# Altium PCB RT5572.PcbDoc
Units mil, origin at the board's own origin, x right, y up, seen from the top; angles counter-clockwise.
Board outline 1354.61 x 1795 mil, 4 copper layers (Top Layer, GND, Signal Layer 1, Bottom Layer), stack 39.217 mil thick; 100 components, 53 nets, 300 pads, 138 vias.
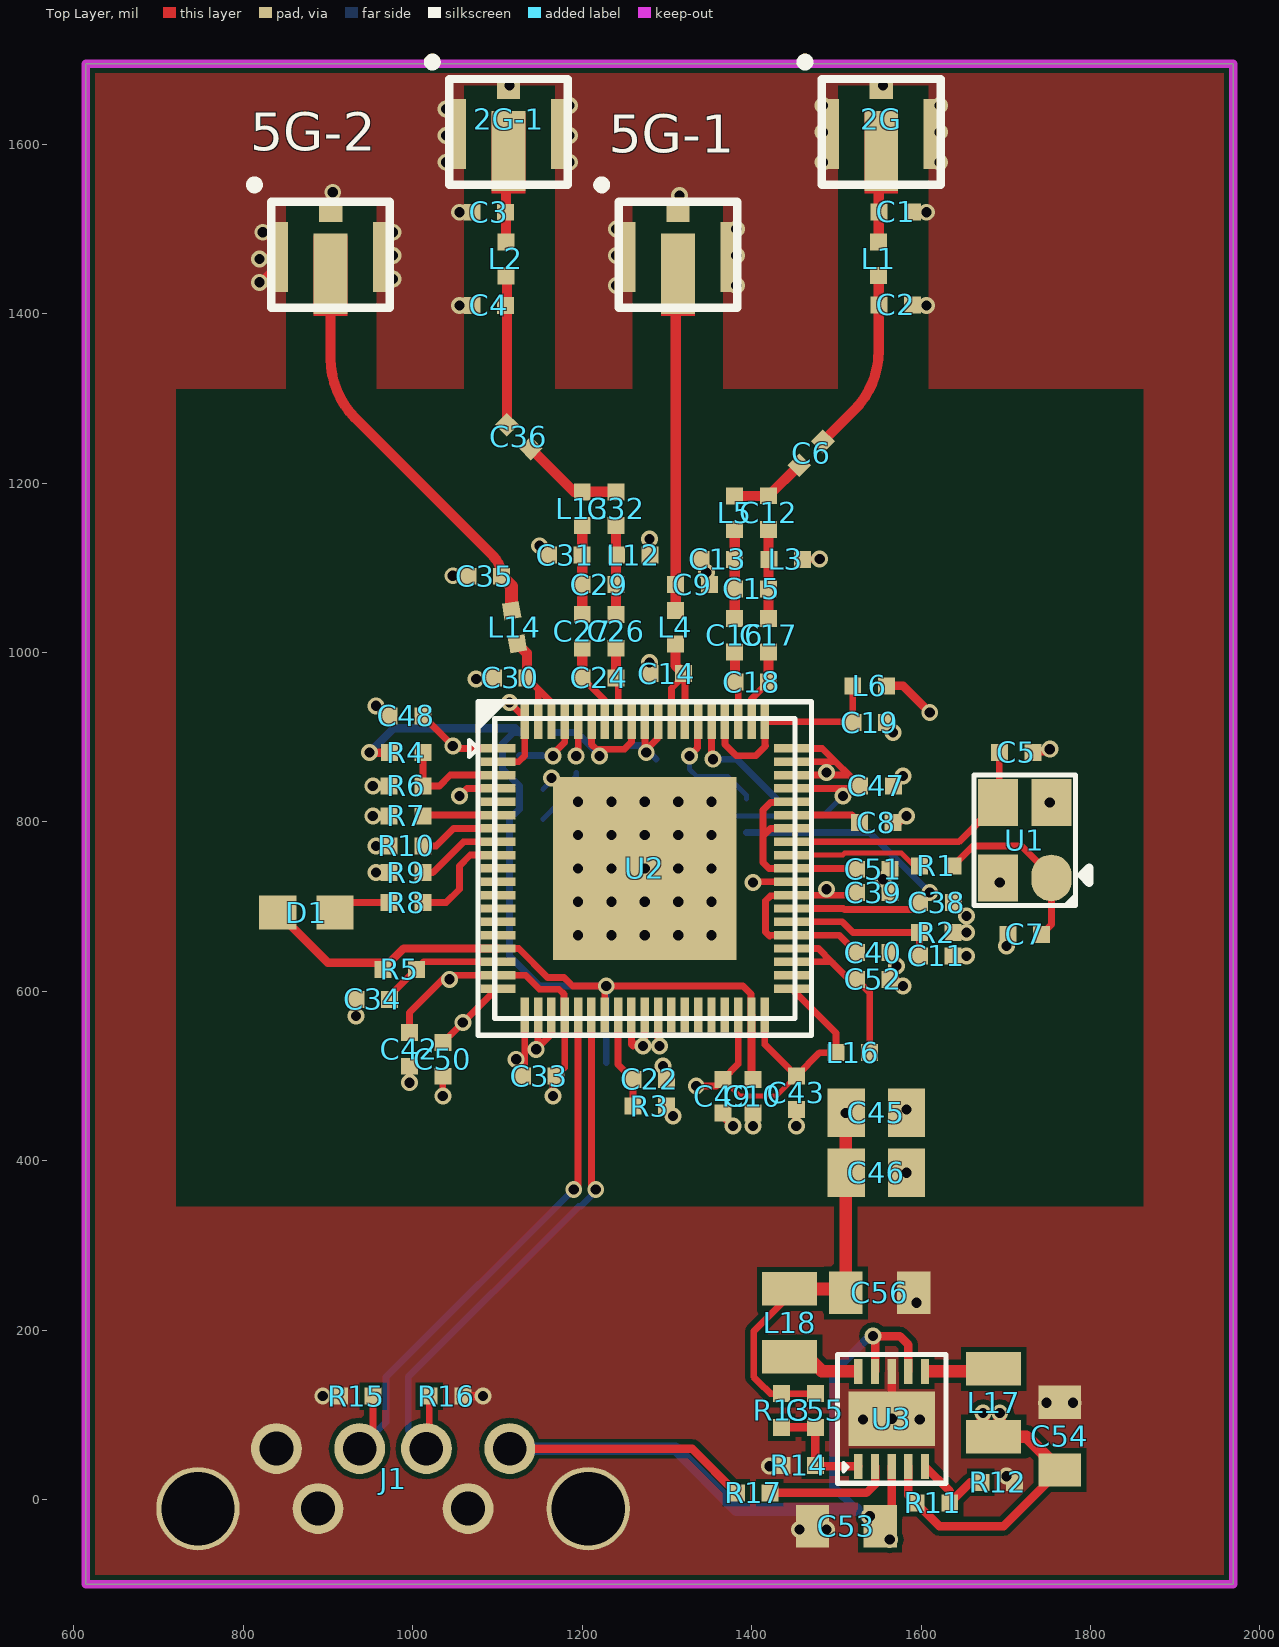
[diagram p0: Top Layer view]
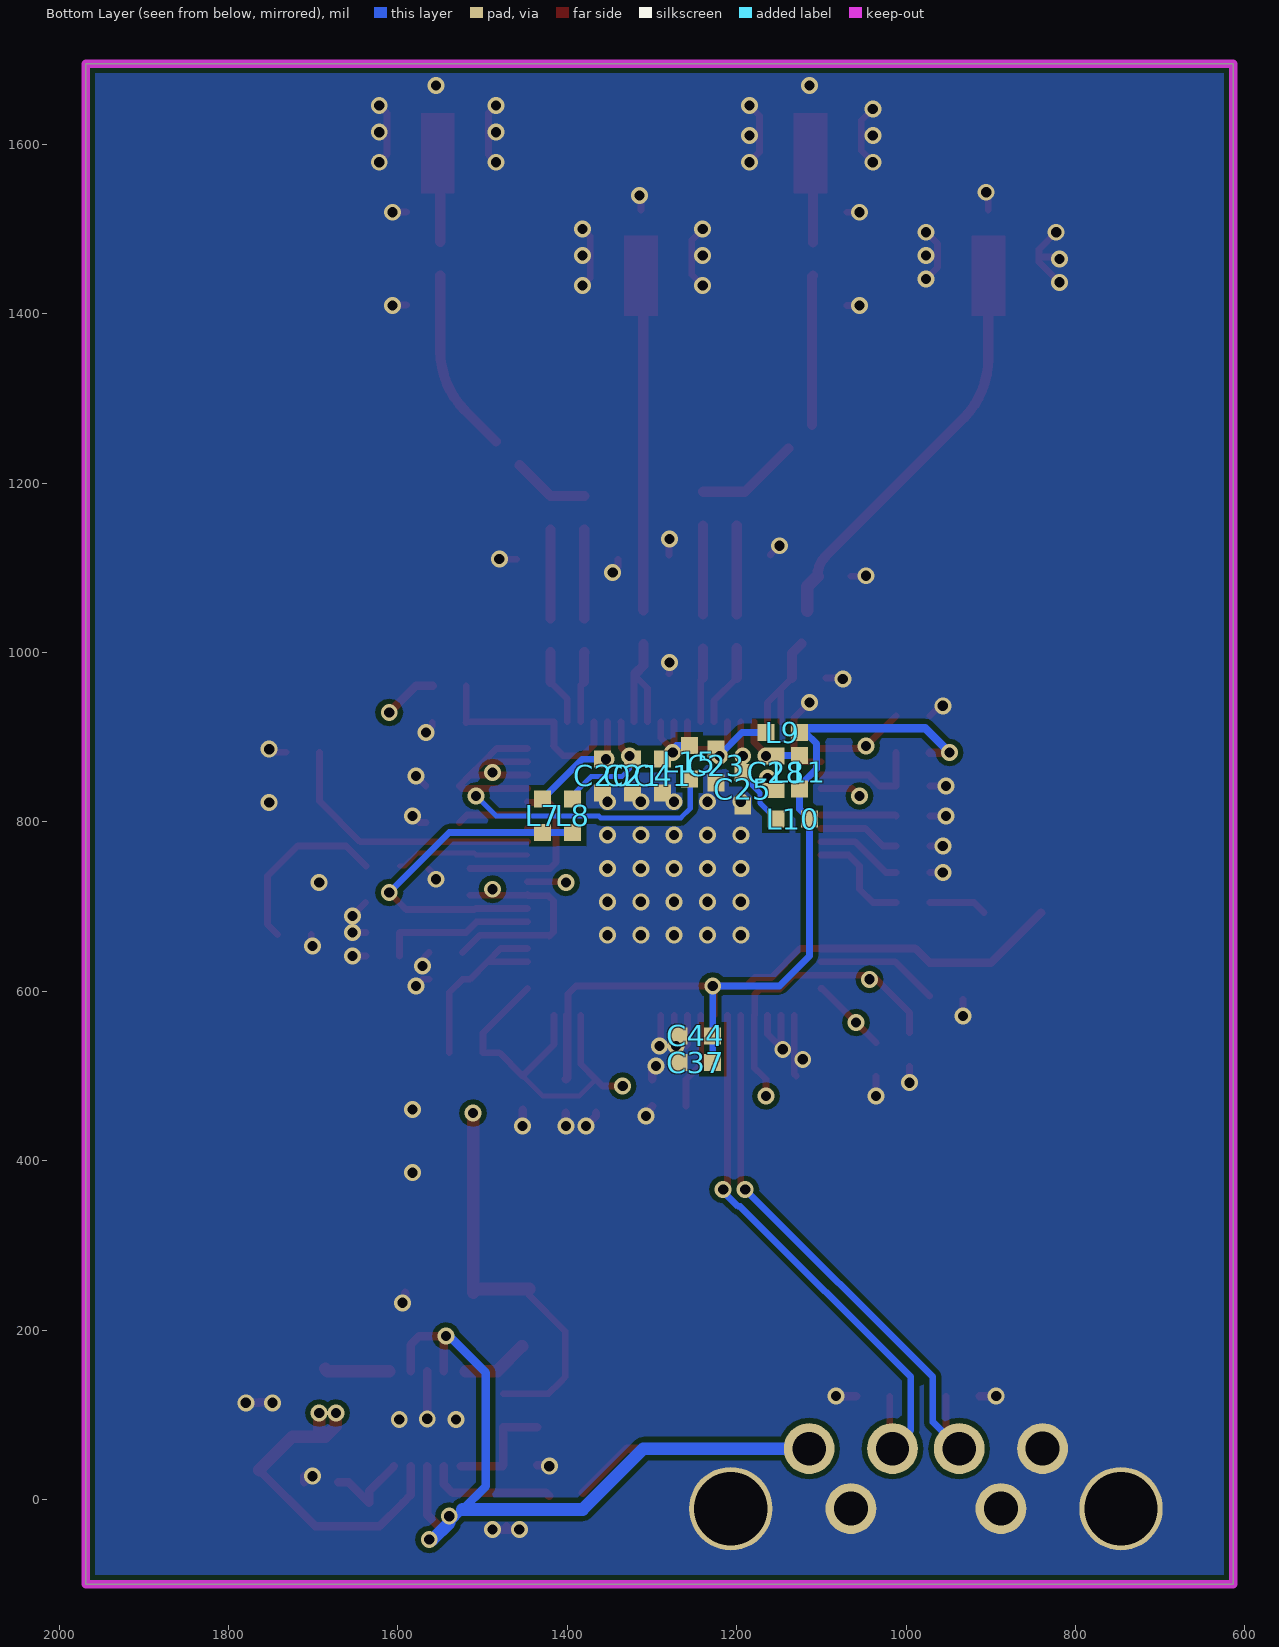
[diagram p1: Bottom Layer view, seen from below]
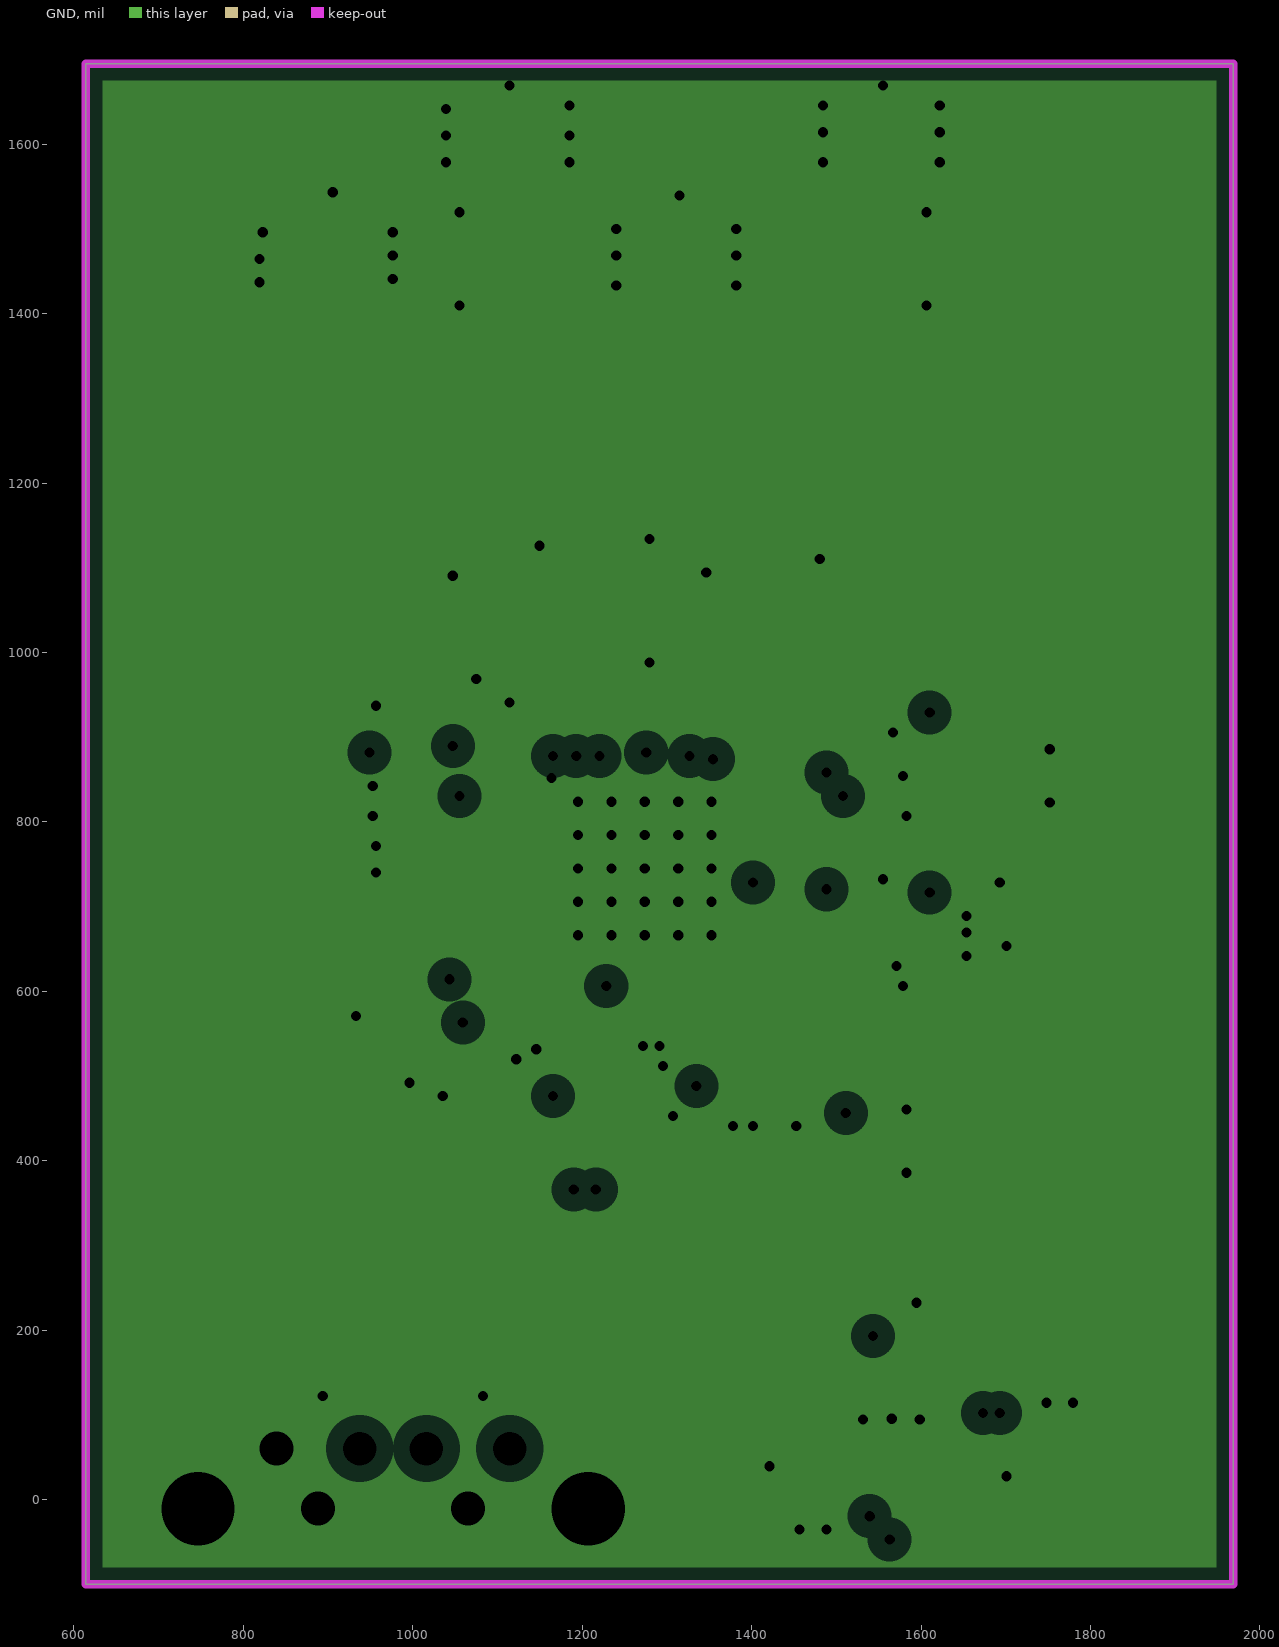
[diagram p2: GND, clearances drawn from the general rule]
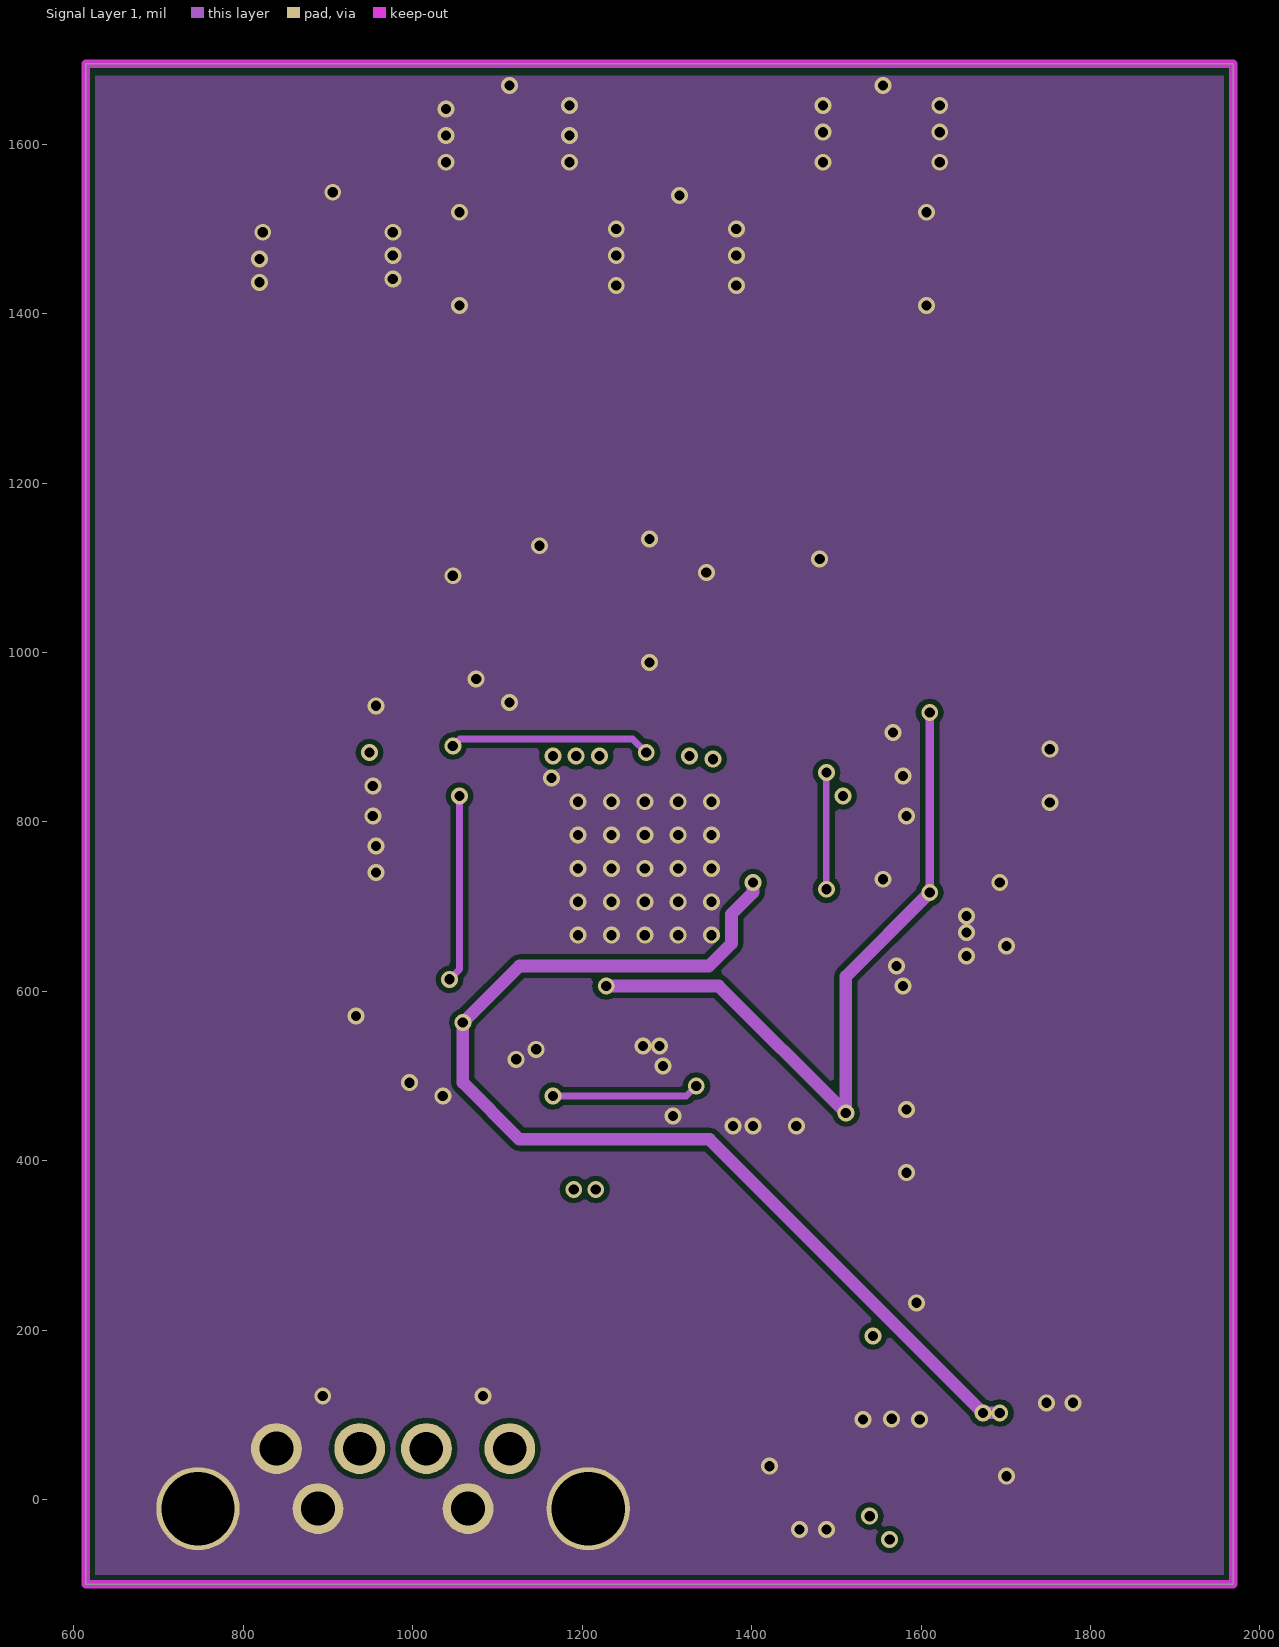
[diagram p3: Signal Layer 1]

## Layer stack, top to bottom
Top Solder: solder mask 0.4, Solder Resist, Dk 3.5
Top Layer: signal copper 1.4
Dielectric1: core 7.6772, FR-4, Dk 4.2
GND: plane copper 0.689, net GND
Dielectric 3: prepreg 19.685, Dk 4.2
Signal Layer 1: signal copper 0.689
Dielectric 2: core 7.6772, Dk 4.2
Bottom Layer: signal copper 1.4
Bottom Solder: solder mask 0.4, Solder Resist, Dk 3.5

## Board outline
613.9,-100 613.9,1695 1968.5,1695 1968.5,-100

## Design rules (kind name [scope] priority, off if disabled: settings)
Clearance [All] p1: gap=6
MinimumSolderMaskSliver [All] p1 off: minsoldermaskwidth=10
PlaneClearance [All] p1: clearance=20
PlaneConnect [All] p1: planeconnectstyle=Direct reliefexpansion=20 reliefentries=4 reliefconductorwidth=10 reliefairgap=10
PolygonConnect [All] p1: connectstyle=Direct reliefconductorwidth=10 reliefentries=4 polygonreliefangle="90 Angle" airgapwidth=10
RoomDefinition 4-USB-A [InComponentClass('4-USB-A')] p1 off: confinementstyle=ConfineIn formatcopy=TRUE lockcomponents=FALSE outline -5946.1,-8780 -3946.1,-8780 -3946.1,-7780 -5946.1,-7780
RoomDefinition 3-RT5572-WLAN [InComponentClass('3-RT5572-WLAN')] p2 off: confinementstyle=ConfineIn formatcopy=TRUE lockcomponents=FALSE outline -5946.1,-8780 -3946.1,-8780 -3946.1,-7780 -5946.1,-7780
RoomDefinition 2-FrontEnd [InComponentClass('2-FrontEnd')] p3 off: confinementstyle=ConfineIn formatcopy=TRUE lockcomponents=FALSE outline -5946.1,-8780 -3946.1,-8780 -3946.1,-7780 -5946.1,-7780
RoutingVias [All] p1: holewidth=12 width=20 viastyle="Through Hole" minholewidth=12 minwidth=20 maxholewidth=28 maxwidth=50
SilkToSilkClearance [All] p1 off: silktosilkclearance=10
SilkToSolderMaskClearance [IsPad] p1 off: minsilkscreentomaskgap=10 clearancetoexposedcopper=TRUE
SolderMaskExpansion [All] p1 off: expansion=4
UnpouredPolygon [All] p1: allowunpoured=FALSE
Width [All] p1: maxlimit=20 minlimit=6 preferedwidth=10
24 further rules are at their usual default settings.

## Classes and differential pairs
component class 2-FrontEnd: 2G 2G-1 5G 5G-1 5G-2 C1 C2 C3 C4 C9 C14 C30 C35 L1 L2 L4 L14
component class 3-RT5572-WLAN: C5 C6 C7 C8 C10 C11 C12 C13 C15 C16 C17 C18 C19 C20 C21 C22 C23 C24 C25 C26 C27 C28 C29 C31 C32 C33 C34 C36 C37 C38 C39 C40 C41 C42 C43 C44 C45 C46 C47 C48 C49 C50 C51 C52 D1 L3 L5 L6 L7 L8 L9 L10 L11 L12 L13 L15 L16 R1 R2 R3 R4 R5 R6 R7 R8 R9 R10 U1 U2
component class 4-USB-A: C53 C54 C55 C56 J1 L17 L18 R11 R12 R13 R14 R15 R16 R17 U3

## Components (designator, comment, footprint, x,y, rotation, side; value= is the part's Value field where it differs from the comment)
2G "IPEX" IPEX 1555,1610 r0 top
2G-1 "IPEX" IPEX 1115,1610 r0 top
5G-1 "IPEX" IPEX 1315,1465 r0 top
5G-2 "IPEX" IPEX 905,1465 r0 top
C1 "0.3pF" 0402 1570,1520 r0 top
C2 "0.3pF" 0402 1570,1410.32 r0 top
C3 "0.3pF" 0402 1090,1519.69 r180 top
C4 "0.3pF" 0402 1090,1409.69 r180 top
C5 "8.2pF" 0402 1712.4,882.13 r180 top
C6 "2.7pF" 0402 1470,1235 r45 top
C7 "47pF" 0402 1722.4,667.13 r180 top
C8 "22nF" 0402 1547.24,799.21 r180 top
C9 "NI" 0402 1330,1080 r0 top
C10 "0.1uF" 0402 1401.57,476.38 r270 top
C11 "100pF" 0402 1618.11,641.73 r180 top
C12 "1.2pF" 0402 1420,1165 r90 top
C13 "1.2pF" 0402 1360,1110 r0 top
C14 "0.4pF" 0402 1300,975 r180 top
C15 "NI" 0402 1400,1075 r180 top
C16 "1.2pF" 0402 1380,1020 r90 top
C17 "1.2pF" 0402 1420,1020 r90 top
C18 "1pF" 0402 1400,965 r0 top
C19 "5.6pF" 0402 1539.37,917.32 r0 top
C20 "1uF" 0402 1358.27,854.33 r270 bottom
C21 "1uF" 0402 1322.83,854.33 r270 bottom
C22 "1pF" 0402 1279.53,496.06 r0 top
C23 "0.1uF" 0402 1224.41,866.14 r270 bottom
C24 "1pF" 0402 1220,970 r180 top
C25 "1uF" 0402 1192.91,838.58 r270 bottom
C26 "2pF" 0402 1240,1025 r270 top
C27 "2pF" 0402 1200,1025 r270 top
C28 "1uF" 0402 1153.54,858.27 r270 bottom
C29 "1.2pF/NI" 0402 1220,1080 r180 top
C30 "0.4pF" 0402 1115,970 r180 top
C31 "1pF" 0402 1180,1115 r180 top
C32 "1pF" 0402 1240,1170 r270 top
C33 "1uF" 0402 1149.61,500 r180 top
C34 "0.1uF" 0402 952.76,590.55 r180 top
C35 "NI" 0402 1085,1090 r180 top
C36 "10pF" 0402 1125,1255 r315 top
C37 "0.1uF" 0402 1248.03,515.75 r0 bottom
C38 "0.1uF" 0402 1618.11,704.72 r0 top
C39 "0.1uF" 0402 1543.31,716.54 r0 top
C40 "NI" 0402 1543.31,645.67 r0 top
C41 "1uF" 0402 1287.4,854.33 r270 bottom
C42 "0.1uF" 0402 996.06,531.5 r270 top
C43 "1uF/NI" 0402 1452.76,480.32 r270 top
C44 "1uF" 0402 1248.03,547.24 r0 bottom
C45 "10uF" 0805#1 1547.24,456.69 r0 top
C46 "10uF" 0805#1 1547.24,385.83 r0 top
C47 "1uF" 0402 1547.24,842.52 r0 top
C48 "1uF" 0402 992.13,925.2 r180 top
C49 "0.1uF" 0402 1366.14,476.38 r270 top
C50 "1uF" 0402 1035.43,519.68 r270 top
C51 "1uF" 0402 1543.31,744.09 r0 top
C52 "0.1uF" 0402 1543.31,614.17 r0 top
C53 "10UF" 0805#2 1511.81,-31.5 r0 top
C54 "22UF" 0805#2 1763.78,74.8 r270 top
C55 "33pF" 0402 1475.36,104.98 r90 top
C56 "22UF" 0805#2 1551.18,244.09 r180 top
D1 "LED" 0603 874.02,692.91 r0 top
J1 "USB" USB-A-MALE 976.38,-15.75 r270 top
L1 "1nH" 0402 1550,1465 r270 top
L2 "1nH" 0402 1110,1464.69 r270 top
L3 "3.0nH" 0402 1440,1110 r0 top
L4 "0 ohm" 0402 1310,1030 r270 top
L5 "3.0nH" 0402 1380,1165 r270 top
L6 "0 ohm" 0402 1539.37,960.63 r180 top
L7 "0 ohm" 0402 1429.13,807.09 r90 bottom
L8 "0 ohm" 0402 1393.7,807.09 r90 bottom
L9 "0 ohm" 0402 1145.67,905.51 r0 bottom
L10 "0 ohm" 0402 1133.86,803.15 r0 bottom
L11 "0 ohm" 0402 1125.98,858.27 r90 bottom
L12 "2.7nH" 0402 1260,1115 r0 top
L13 "2.7nH" 0402 1200,1170 r270 top
L14 "0 ohm" 0402 1120,1030 r280 top
L15 "0 ohm" 0402 1255.91,870.08 r90 bottom
L16 "0 ohm" 0402 1519.69,527.56 r180 top
L17 "2.2UH" 0806 1685.79,114.29 r270 top
L18 "3.3UH" 0806 1444.88,208.66 r90 top
R1 "0 ohm" 0402 1618.11,748.03 r180 top
R2 "12K" 0402 1618.11,669.29 r180 top
R3 "8.2K" 0402 1279.53,464.57 r0 top
R4 "1K" 0402 992.13,881.89 r0 top
R5 "100K" 0402 984.25,625.98 r0 top
R6 "1K/NI" 0402 992.13,842.52 r180 top
R7 "4.7K" 0402 992.13,807.09 r180 top
R8 "330R" 0402 992.13,704.72 r180 top
R9 "4.7K" 0402 992.13,740.16 r180 top
R10 "4.7K" 0402 992.13,771.65 r180 top
R11 "270k" 0402 1614.17,-3.94 r180 top
R12 "180k" 0402 1690.36,20.29 r0 top
R13 "300k" 0402 1435.36,104.98 r90 top
R14 "68k" 0402 1455.67,40.29 r180 top
R15 "1M/NI" 0402 933.07,122.05 r0 top
R16 "1M/NI" 0402 1039.37,122.05 r180 top
R17 "10k" 0402 1401.57,7.87 r0 top
U1 "XTAL/3.2x2.5/40MHz/85C" XTAL-SMD/3.2X2.5 1722.4,777.13 r270 top
U2 "RT5572-QFN76" QFN40P-900X900X90-77N 1273.9,745 r0 top
U3 "Tps62410" DFN-10P-3X3 1565.32,96.29 r90 top

## Footprints (in the part's own frame and the unit in brackets; to place one, negate y for a bottom-side part, rotate by r counter-clockwise, add the part's x,y. Pads: shape width x height; smd on the part's side, far side on the other; paste and mask are expansions set on the pad)
0402 [mil] "0402-RES"
  rect 20x20 smd: 1(-19.68,0) 2(20,0)
0603 [mil] "0603-RES"
  rect 44x40 smd: 1(-33.46,0) 2(34,0)
0805#1 [mil]
  rect 44x57 smd: 1(-35.5,0) 2(35.5,0)
0805#2 [mil]
  rect 39.37x50 smd: 1(-40,0) 2(40,0)
  body extent -50,-30 50,30, height 31
0806 [mm]
  rect 1x1.65 smd: 1(-1.016,0) 2(1.016,0)
  body extent -1,-0.8 1,0.8, height 0.5
DFN-10P-3X3 [mm]
  rect 0.75x0.25 smd mask+0.064: 1(-1.451,0.999) 2(-1.451,0.499) 3(-1.451,-0.001) 4(-1.451,-0.501) 5(-1.451,-1.001) 6(1.4,-1.001) 7(1.4,-0.501) 8(1.4,-0.001) 9(1.4,0.499) 10(1.4,0.999)
  rect 1.64x2.6 smd: 11(-0.025,-0.001)
  silkscreen extent -1.96,-1.63 1.9,1.62
IPEX [mil]
  rect 40x95 smd: 1(-2,-18)
  rect 19.68x82.68 smd: 2(-62,2) 2(58,2)
  rect 27.56x27.56 smd: 2(-2,57)
  Top Layer region: -22,-68 18,-68 18,27 -22,27
  silkscreen extent -97,-58 68,92
QFN40P-900X900X90-77N [mm]
  rect 1.05x0.254 smd mask+0: 1(-4.4,3.6) 2(-4.4,3.2) 3(-4.4,2.8) 4(-4.4,2.4) 5(-4.4,2) 6(-4.4,1.6) 7(-4.4,1.2) 8(-4.4,0.8) 9(-4.4,0.4) 10(-4.4,0) 11(-4.4,-0.4) 12(-4.4,-0.8) 13(-4.4,-1.2) 14(-4.4,-1.6) 15(-4.4,-2) 16(-4.4,-2.4) 17(-4.4,-2.8) 18(-4.4,-3.2) 19(-4.4,-3.6)
  rect 0.254x1.05 smd: 20(-3.601,-4.4) 21(-3.201,-4.4) 22(-2.801,-4.4) 23(-2.401,-4.4) 24(-2.001,-4.4) 25(-1.601,-4.4) 26(-1.201,-4.4) 27(-0.801,-4.4) 28(-0.401,-4.4) 29(-0.001,-4.4) 30(0.399,-4.4) 31(0.799,-4.4) 32(1.199,-4.4) 33(1.599,-4.4) 34(1.999,-4.4) 35(2.399,-4.4) 36(2.799,-4.4) 37(3.199,-4.4) 38(3.599,-4.4) 58(3.602,4.4) 59(3.202,4.4) 60(2.802,4.4) 61(2.402,4.4) 62(2.002,4.4) 63(1.602,4.4) 64(1.202,4.4) 65(0.802,4.4) 66(0.402,4.4) 67(0.002,4.4) 68(-0.398,4.4) 69(-0.798,4.4) 70(-1.198,4.4) 71(-1.598,4.4) 72(-1.998,4.4) 73(-2.398,4.4) 74(-2.798,4.4) 75(-3.198,4.4) 76(-3.598,4.4)
  rect 1.05x0.254 smd: 39(4.4,-3.6) 40(4.4,-3.2) 41(4.4,-2.8) 42(4.4,-2.4) 43(4.4,-2) 44(4.4,-1.6) 45(4.4,-1.2) 46(4.4,-0.8) 47(4.4,-0.4) 48(4.4,0) 49(4.4,0.4) 50(4.4,0.8) 51(4.4,1.2) 52(4.4,1.6) 53(4.4,2) 54(4.4,2.4) 55(4.4,2.8) 56(4.4,3.2) 57(4.4,3.6)
  rect 5.5x5.5 smd: 77(0,0)
  silkscreen extent -5.26,-5 5,5
USB-A-MALE [mil]
  round 98.43 hole 86.61: 0(-5,230.63) 0(-5,-230)
  round 60 hole 40: 0(-5,88.9) 0(-5,-88.27) 4(-75.87,-137.48)
  round 60 hole 39.37: 1(-75.87,138.11) 2(-75.87,39.69) 3(-75.87,-39.06)
  body extent 3,-234 743,239, height 157
XTAL-SMD/3.2X2.5 [mm]
  oval 1.4x1.2 smd mask+0.051: 1(1.1,0.8)
  rect 1.4x1.2 smd mask+0.051: 2(-1.163,0.8) 3(-1.162,-0.8) 4(1.1,-0.8)
  silkscreen extent -1.98,-1.52 1.93,1.93

## Part data
2G 2G-1 5G-1 5G-2: library part ANT-RA-USB-1
C1 C2 C3 C4 C5 C6 C7 C8 C9 C10 C11 C12 C13 C14 C15 C16 C17 C18 C19 C20 C21 C22 C23 C24 C25 C26 C27 C28 C29 C30 C31 C32 C33 C34 C35 C36 C37 C38 C39 C40 C41 C42 C43 C44 C47 C48 C49 C50 C51 C52 C53 C54 C55 C56: library part CAP/0402
C45 C46: library part CAP/0603
D1: library part LED/0603
L1 L2 L3 L4 L5 L6 L7 L8 L9 L10 L11 L13 L14 L15 L16: library part L/0402
L12: library part L/0402_0
L17 L18: library part L/2.5*2.0
R1 R2 R5: library part RES/0402_1_Dup1
R3 R15 R16: library part RES/0402_2
R4 R6 R7 R9 R10: library part RES/0402_1_Dup2
R8: library part RES/0402_1
R11 R12 R13 R14 R17: library part RES/0402_3
U1: library part XTAL_2.5
U2: library part RT5572_5

## Via types
v1: diameter 20, hole 12, Top Layer to Bottom Layer, 110 vias
v2: diameter 20/20/20 (per signal layer), hole 12, Top Layer to Bottom Layer, 28 vias

## Nets (pads, with @x,y where several pads share a name; then routed paths per layer and width w, separated by ;. In a path a pad name is that pad's centre, name@x,y a point inside that pad or via, vN(x,y) a via of type N, cw(c..) or ccw(c..) an arc to the next point about the centre after c; other vN are vias at no path point)
1.2VA: C52.1 L16.1 U2.41 U2.42 | length 234.3
  Top Layer w8: U2.41 1494.53,634.76 ; U2.42 1478.78,650.51 1494.53,634.76 ; 1496.06,633.23 1494.53,634.76 ; L16.1 1539.37,598.43 C52.1 1515.12,614.17 1494.53,634.76
1.2VD: C33.1 C42.1 C43.1 C49.1 L16.2 U2.4 U2.18 U2.23 U2.36 U2.38 U2.39 | length 1270.4
  Top Layer w6: C49.1 1385.83,476.38 1429.13,476.38 C43.1
  Top Layer w8: C42.1 996.06,574.8 1040.27,619.01 U2.18 1132.96,619.01 1149.53,602.44 1172.77,602.44 1178.63,596.58 1178.63,572.52 U2.23 1179.38,510.09 C33.1 1165.35,496.06 v1(1165.35,476.38) ; v1(1055.12,830.71) 1063.89,839.49 U2.4 ; v1(1334.65,488.19) 1358.27,488.19 C49.1 1384.1,514.03 U2.36 ; U2.38 1415.6,537.16 C43.1 1480.32,527.56 L16.2 1499.69,550.71 U2.39
  Signal Layer 1 w8: v1(1043.31,614.17) 1055.12,625.99 v1(1055.12,830.71) ; v1(1165.35,476.38) 1322.83,476.38 v1(1334.65,488.19)
1.2VPLL: C51.1 U2.48 U2.51 U2.53 | length 241.6
  Top Layer w8: U2.51 1422.17,792.24 1413.39,783.46 ; U2.53 1446.38,822.99 1422.31,822.99 1413.39,814.06 1413.39,783.46 ; C51.1@1514.84,745 U2.48 1420.35,745 1413.39,751.97 1413.39,783.46
1.2VRF: C39.1 C40.1 C47.1 L15.1 U2.43 U2.46 U2.54 U2.55 U2.56 U2.57 | length 999.4
  Top Layer w8: U2.46@1447.13,714.25 U2.46 ; U2.54 1524.53,839.49 C47.1 1514.84,855.24 ; U2.55 1514.84,855.24 ; U2.56 1499.09,870.98 ; U2.57 1483.35,886.73 1499.09,870.98 ; v1(1488.19,720.47) v1@1481.22,713.5 ; C39.1@1514.84,713.5 v1@1481.22,713.5 ; C40.1 1503.03,666.26 U2.43 1422.17,666.26 1421.26,665.35 1416.46,670.16 1416.46,706.9 1422.31,712.76 1446.38,712.76 U2.46 ; U2.46 v1@1481.22,713.5 ; 1499.09,870.98 1514.84,855.24
  Signal Layer 1 w8: v1(1488.19,720.47) v1(1488.19,858.27)
  Bottom Layer w6: L15.1@1254.9,842.52 1254.9,815.87 1266.03,804.74 1360.51,804.74 1362.85,807.09 1484.25,807.09 v1(1507.87,830.71)
1.2VRF1: C41.1 C48.1 L15.2 U2.1 U2.66 U2.67 | length 459.6
  Top Layer w8: C48.1 v1(1047.24,889.76) 1050.28,886.73 U2.1 ; U2.67 v1@1273.97,883.51 ; v1(1275.59,881.89) v1@1273.97,883.51 ; U2.66 1289.71,899.26 v1@1273.97,883.51
  Signal Layer 1 w8: v1(1047.24,889.76) 1055.43,897.95 1259.53,897.95 v1(1275.59,881.89)
  Bottom Layer w8: L15.2 1271.34,890.08 C41.1
1.5V: C50.1 C54.2 L17.2 R11.2 U2.19 U2.47 U3.4 | length 1856
  Top Layer w8: C50.1 v1(1059.06,562.99) 1099.33,603.26 U2.19 ; v1(1401.57,728.34) 1402.48,729.25 U2.47
  Top Layer w10: U3.4 1585.04,5.2 R11.2 1621.73,-31.5 1697.48,-31.5 C54.2
  Top Layer w15: v1(1673.23,102.36) 1673.23,86.85 L17.2 ; v1(1692.91,102.36) 1692.91,81.42 L17.2 ; C54.2 1724.29,74.29 L17.2
  Signal Layer 1 w15: v1(1401.57,728.34) 1401.57,716.53 1376.14,691.1 1376.14,656.53 1349.53,629.92 1125.98,629.92 v1(1059.06,562.99) 1059.06,492.13 1125.98,425.2 1350.39,425.2 v1(1673.23,102.36) v1(1692.91,102.36)
3.3V: C10.1 C37.1 C38.1 C44.1 C45.1 C46.1 C55.2 C56.2 D1.1 L6.1 L7.1 L8.1 L9.1 L10.1 L11.1 L18.2 R4.1 R5.1 R13.2 U2.16 U2.26 U2.37 U2.45 | length 3304.1
  Top Layer w8: U2.16 1125.08,650.51 1159.15,616.44 1178.57,616.44 1188.72,606.3 v1@1226.62,606.3 ; v1@1224.41,602.36 v1@1226.62,604.58 ; U2.26 v1@1226.62,604.58 ; U2.37 1399.1,572.52 1399.1,596.96 1389.76,606.3 v1@1226.63,606.3 ; L18.2 1444.88,240.83 1402.4,198.35 1402.4,144.83 1408.26,138.98 1422.27,124.98 R13.2 C55.2 ; U2.45 1508.26,697.76 1509.48,696.54 1590.24,696.54 C38.1 v1(1610.24,716.54) ; v1@1226.62,604.58 v1@1226.62,606.3 ; v1@1226.62,604.58 v1(1228.34,606.3) v1@1226.62,606.3
  Top Layer w10: D1.1 899.61,633.86 972.44,633.86 989.09,650.51 U2.16 ; v1(948.82,881.89) R4.1 ; U2.37 1399.85,497.79 C10.1 ; L6.1 1578.74,960.63 v1(1610.24,929.13)
  Top Layer w15: L18.2 1506.61,248.66 C56.2 v1(1511.18,456.13) C45.1
  Signal Layer 1 w10: v1(1610.24,716.54) v1(1610.24,929.13)
  Signal Layer 1 w15: v1(1228.34,606.3) 1361.01,606.3 v1(1511.18,456.13) 1511.18,617.48 v1(1610.24,716.54)
  Bottom Layer w8: L9.1 1119.09,905.51 1105.98,892.41 1105.98,862.52 1125.98,842.52 L11.1 1125.98,814.96 L10.1 1114.17,641.73 1149.61,606.3 v1(1228.34,606.3) C37.1@1228.34,515.75 ; L8.1 L7.1 1539.37,787.4 v1(1610.24,716.54)
  Bottom Layer w10: v1(948.82,881.89) 977.69,910.76 1120.73,910.76 L9.1
3.3V_PA0: C19.1 L6.2 U2.58 U2.61 | length 261.4
  Top Layer w8: U2.61 1368.45,891.39 1374.02,885.83 1381.89,877.95 1404.65,877.95 1416.46,889.76 1415.7,890.52 U2.58 1518.78,918.23 C19.1@1519.37,917.64 ; L6.2 C19.1@1519.37,917.64 ; C19.1 C19.1@1519.37,917.64
3.3V_PA1: C23.1 L9.2 U2.68 U2.71 | length 180.1
  Top Layer w8: U2.71 1210.97,891.39 v1@1216.54,885.83 ; v1(1220.47,877.95) 1216.54,881.89 v1@1216.54,885.83 ; U2.68 1258.22,894.17 1249.88,885.83 v1@1216.54,885.83
  Bottom Layer w8: L9.2 1193.63,905.51 1220.47,878.68 v1(1220.47,877.95)
20MX2: R1.2 U2.49 | length 158.2
  Top Layer w6: U2.49 1507.55,760.75 1509.89,763.09 1577.04,763.09 1592.1,748.03 R1.2
BG_RES_12K: C11.2 R2.2 U2.44 | length 183.8
  Top Layer w8: U2.44 1507.08,682.01 1519.74,669.35 R2.2 R2.2 C11.2
C20_2: C13.2 C15.2 C16.2 L5.2 | length 105
  Top Layer w12: C16.2 C15.2 C13.2 L5.2
C36_1: C28.1 L11.2 U2.73 | length 73.8
  Top Layer w8: v1(1165.35,877.95) 1165.35,880.04 1179.48,894.16 U2.73
  Bottom Layer w8: L11.2 1153.23,878.27 C28.1
C40_1: C27.1 C29.2 C31.1 L13.2 | length 105.3
  Top Layer w12: C27.1 C29.2 L13.2
EFUSE: R9.1 U2.8 | length 103.9
  Top Layer w8: R9.1 1023.62,740.16 1059.96,776.49 U2.8
GND: 2G-1.2 2G.2 5G-1.2 5G-2.2 C1.2 C2.2 C3.2 C4.2 C5.1 C7.2 C8.1 C9.2 C10.2 C11.1 C13.1 C14.2 C19.2 C20.2 C21.2 C22.2 C23.2 C25.2 C28.2 C30.2 C31.2 C33.2 C34.2 C35.2 C37.2 C38.2 C39.2 C40.2 C41.2 C42.2 C43.2 C44.2 C45.2 C46.2 C47.2 C48.2 C49.2 C50.2 C51.2 C52.2 C53.1 C54.1 C56.1 J1.0 J1.4 L3.2 L12.2 R2.1 R3.2 R6.2 R7.2 R9.2 R10.2 R12.2 R14.2 R15.1 R16.1 U1.2 U1.4 U2.2 U2.20 U2.21 U2.22 U2.28 U2.29 U2.30 U2.76 U2.77 U3.8 U3.11 | length 2024.9
  Top Layer w8: v1(818.9,1437.01) 843,1461.11 5G-2.2@843,1467 ; v1(818.9,1464.57) 821.33,1467 5G-2.2@843,1467 ; v1(822.83,1496.06) 843,1475.9 5G-2.2@843,1467 ; 5G-2.2@903,1522 903,1540.8 v1(905.51,1543.31) ; C34.2 932.76,571.18 v1(933.07,570.87) ; v1(952.76,807.09) R7.2 ; v1(952.76,842.52) R6.2 ; v1(956.69,740.16) R9.2 ; v1(956.69,771.65) R10.2 ; v1(956.69,937.01) 960.32,937.01 C48.2 ; v1(976.38,1440.94) 963,1454.32 5G-2.2@963,1467 ; v1(976.38,1468.5) 974.87,1467 5G-2.2@963,1467 ; v1(976.38,1496.06) 963,1482.68 5G-2.2@963,1467 ; v1(996.06,492.13) C42.2 ; v1(1035.43,476.38) C50.2 ; v1(1039.37,1578.74) 1053,1592.37 2G-1.2@1053,1612 ; v1(1039.37,1610.24) 1041.13,1612 2G-1.2@1053,1612 ; v1(1039.37,1641.73) 1053,1628.1 2G-1.2@1053,1612 ; v1(1047.24,1090.55) 1047.8,1090 C35.2 ; v1(1055.12,1409.45) 1055.35,1409.69 C4.2 ; v1(1055.12,1519.68) C3.2 ; v1(1074.8,968.5) 1076.3,970 C30.2 ; U2.2 1124.73,870.98 1132.23,878.48 U2.76 1132.23,922.88 v1(1114.17,940.94) ; 2G-1.2@1113,1667 1114.17,1668.17 v1(1114.17,1669.29) ; v1(1122.05,519.68) 1132.14,519.68 ; C33.2 1132.14,502.53 1132.14,519.68 ; U2.20 1132.14,519.68 ; v1(1145.67,531.5) v1@1147.88,533.71 ; U2.21 v1@1147.88,533.71 ; v1(1149.61,1125.98) 1160,1115.59 C31.2 ; U2.22 1163.63,549.46 v1@1147.88,533.71 ; v1(1185.04,1578.74) 1173,1590.78 2G-1.2@1173,1612 ; v1(1185.04,1610.24) 1183.28,1612 2G-1.2@1173,1612 ; v1(1185.04,1645.67) 1173,1633.63 2G-1.2@1173,1612 ; v1(1240.16,1433.07) 1253,1445.91 5G-1.2@1253,1467 ; v1(1240.16,1468.5) 1238.65,1467 5G-1.2@1253,1467 ; v1(1240.16,1500) 1253,1487.16 5G-1.2@1253,1467 ; U2.28 1258.12,537.16 1259.84,535.43 1262.06,537.65 v1@1273.87,537.65 ; v1(1271.65,535.43) v1@1273.87,537.65 ; U2.29 v1@1273.87,537.65 ; v1(1279.53,988.19) 1279.53,975.47 C14.2 ; v1(1279.53,1133.86) 1280,1133.39 L12.2 ; U2.30 1289.62,537.16 v1(1291.34,535.43) ; 5G-1.2@1313,1522 1313,1537.41 v1(1314.96,1539.37) ; C13.1 1340.32,1100.63 v1(1346.46,1094.49) ; v1(1381.89,1433.07) 1373,1441.96 5G-1.2@1373,1467 ; v1(1381.89,1468.5) 1380.39,1467 5G-1.2@1373,1467 ; v1(1381.89,1500) 1373,1491.11 5G-1.2@1373,1467 ; L3.2 1480.08,1110 v1(1480.32,1110.24) ; v1(1484.25,1578.74) 1493,1587.49 2G.2@1493,1612 ; v1(1484.25,1614.17) 1490.83,1614.17 2G.2@1493,1612 ; v1(1484.25,1645.67) 1493,1636.92 2G.2@1493,1612 ; 2G.2@1553,1667 1553,1667.17 v1(1555.12,1669.29) ; v1(1555.12,732.28) 1555.12,735.91 C51.2 ; C19.2 1559.37,913.07 v1(1566.93,905.51) ; C52.2 1570.87,614.17 v1(1578.74,606.3) ; C40.2 1574.8,634.17 1574.8,631.51 1573.21,629.92 v1(1570.86,629.92) ; C8.1 1574.8,799.21 v1(1582.68,807.09) ; C47.2 1567.24,842.83 v1(1578.74,854.33) ; C2.2 1605.43,1410.32 v1(1606.3,1409.45) ; C1.2 1605.98,1520 v1(1606.3,1519.68) ; v1(1622.05,1578.74) 1613,1587.79 2G.2@1613,1612 ; v1(1622.05,1614.17) 1619.87,1612 2G.2@1613,1612 ; v1(1622.05,1645.67) 1613,1636.62 2G.2@1613,1612 ; C11.1 v1(1653.54,641.73) ; R2.1 v1(1653.54,669.29) ; C38.2 1653.54,689.29 v1(1653.54,688.98) ; U1.4 1690.91,730.35 v1(1692.91,728.35) ; v1(1700.79,653.54) 1702.4,655.16 C7.2 ; C5.1 1748.27,882.13 v1(1751.97,885.83) ; v1(1751.97,822.83) 1752.06,822.93 U1.2
  Top Layer w10: v1(893.7,122.05) R15.1 ; R16.1 v1(1082.68,122.05) ; v1(1295.28,511.81) 1299.53,507.56 C22.2 ; R3.2 1299.53,464.25 1307.09,456.69 v1(1307.08,452.75) ; C49.2 1366.14,452.76 v1(1377.95,440.94) ; v1(1401.57,440.94) C10.2 ; v1(1421.26,39.37) 1421.26,40.29 R14.2 ; v1(1452.76,440.94) C43.2 ; v1(1456.69,-35.43) C53.1@1471.81,-35.43 ; C53.1 C53.1@1471.81,-35.43 ; v1(1488.19,-35.43) C53.1@1471.81,-35.43 ; v2(1565.36,95.29) U3.8 ; v1(1582.68,385.83) v1(1582.68,385.83) ; v1(1582.68,460.63) v1(1582.68,460.63) C45.2 ; C56.1 1591.18,232.28 v1(1594.49,232.28) ; v1(1700.79,27.56) 1710.36,27.56 R12.2 ; v1(1748.03,114.17) 1748.03,114.8 C54.1 1763.78,114.17 v1(1779.53,114.17)
  Bottom Layer w6: C28.2 1165.35,850.08 1165.35,850.39 1163.8,851.95 v1(1163.66,851.95)
  other v2: 1531.5,94.49 1598.43,94.49 1195.16,666.26 1234.53,666.26 1273.9,666.26 1313.27,666.26 1352.64,666.26 1195.16,705.63 1234.53,705.63 1273.9,705.63 1313.27,705.63 1352.64,705.63 1195.16,745 1234.53,745 1273.9,745 1313.27,745 1352.64,745 1195.16,784.37 1234.53,784.37 1273.9,784.37 1313.27,784.37 1352.64,784.37 1195.16,823.74 1234.53,823.74 1273.9,823.74 1313.27,823.74 1352.64,823.74
GPIO9: R10.1 U2.7 | length 97.4
  Top Layer w8: R10.1 1027.56,771.65 1048.15,792.24 U2.7
L5_1: C12.1 C15.1 C17.2 L3.1 | length 105.3
  Top Layer w12: C17.2 C12.1
L13_1: C26.1 C29.1 C32.2 L12.1 | length 105.3
  Top Layer w12: C26.1 C32.2
LD1P_ACT: D1.2 R8.2 | length 69
  Top Layer w8: D1.2 919.83,704.72 R8.2
LED_ACT_N: R8.1 U2.9 | length 128.2
  Top Layer w8: R8.1 1039.37,704.72 1055.12,720.47 1055.12,748.03 1067.83,760.75 U2.9
Net2G-1_1: 2G-1.1 C3.1 L2.1 | length 108.9
  Top Layer w12: L2.1 1110,1589 2G-1.1
Net2G_1: 2G.1 C1.1 L1.1 | length 108.6
  Top Layer w12: L1.1 1550,1589 2G.1
Net5G-1_1: 5G-1.1 C9.1 L4.1 | length 420.5
  Top Layer w12: L4.1 1310.32,1050 C9.1 1310.32,1440.52 cw(c1319.48,1440.52) 5G-1.1
  Top Layer w15: 5G-1.1@1304.69,1426.93 cw(c1333.07,1426.93) 5G-1.1
Net5G-2_1: 5G-2.1 C35.1 L14.1 | length 480.3
  Top Layer w12: 5G-2.1 903,1347.08 ccw(c1003,1347.08) 932.29,1276.37 1094.8,1113.86 cw(c1070.94,1090) C35.1
  Top Layer w15: C35.1 1116.58,1078.1 L14.1
NetC5_2: C5.2 U1.3 U2.50 | length 322.9
  Top Layer w8: U2.50 1644.54,776.5 U1.3 1692.4,824.35 C5.2
NetC55_1: C55.1 R13.1 R14.1 U3.1 | length 136.1
  Top Layer w10: R13.1 C55.1 R14.1 1476.48,39.17 U3.1
NetL17_1: L17.1 U3.6 | length 76.7
  Top Layer w15: 1610.24,151.41 1682.91,151.41 L17.1
NetL18_1: L18.1 U3.10 | length 78.6
  Top Layer w15: L18.1@1453.39,181.1 1483.07,151.41 1519.69,151.41
NetR11_1: R11.1 R12.1 U3.5 | length 102
  Top Layer w10: U3.5 1633.86,10.04 R11.1 1658.09,20.29 R12.1
NetR17_2: R17.2 U3.2 | length 151.2
  Top Layer w10: R17.2@1421.26,4.25 1424.88,7.87 1535.43,7.87 1545.67,18.11 U3.2
PA_OUT1N: C24.2 C27.2 U2.70 | length 97.8
  Top Layer w8: C24.2 1226.72,943.28 U2.70
  Top Layer w12: C24.2 C27.2
PA_OUT1P: C24.1 C26.2 U2.69 | length 88.1
  Top Layer w8: C24.1 1242.47,967.22 U2.69 ; C26.2@1239.69,1004.68 C26.2
  Top Layer w12: C24.1 C26.2@1239.69,1004.68
PLL_VC_CAP: C8.2 U2.52 | length 83.8
  Top Layer w8: U2.52 1518.46,807.99 C8.2
RF0_2G: C2.1 C6.2 L1.2 | length 218.8
  Top Layer w12: C6.2 1520.71,1285.71 ccw(c1450,1356.42) 1550,1356.42 L1.2
RF0_2G_1: C6.1 C12.2 L5.1 | length 91.2
  Top Layer w12: L5.1 1419.69,1184.68 C12.2 C6.1
RF0_5G_PA2_V33: C21.1 L8.2 U2.63 | length 144.4
  Top Layer w8: v1(1326.77,877.95) 1336.21,887.39 1336.21,917.48 U2.63
  Bottom Layer w6: v1(1326.77,877.95) 1326.77,862.21 1335.65,853.33 1372,853.33 1393.7,831.63 L8.2
RF0_5G_TXRX: C14.1 L4.2 U2.64 U2.65 | length 158.2
  Top Layer w8: U2.65 1305.46,957.73 C14.1@1321.21,973.48 ; C14.1 C14.1@1321.21,973.48 ; U2.64 C14.1@1321.21,973.48
  Top Layer w12: L4.2 1310,984.68 C14.1
RF0_PA1_V33A: C20.1 L7.2 U2.62 | length 139.1
  Top Layer w8: U2.62 1352.71,875.64 v1(1354.33,874.01)
  Bottom Layer w8: v1(1354.33,874.01) 1382.21,874.01 L7.2
RF1_2G: C4.1 C36.1 L2.2 | length 176.2
  Top Layer w12: L2.2 1111.08,1443.6 C36.1
RF1_2G_1: C32.1 C36.2 L13.1 | length 122.1
  Top Layer w12: C36.2 1190.32,1189.68 L13.1 C32.1
RF1_5G_TXRX: C30.1 L14.2 U2.74 U2.75 | length 147.2
  Top Layer w8: C30.1 1147.98,956.7 ; U2.75 1147.98,956.7 ; U2.74 1163.73,940.95 1147.98,956.7
  Top Layer w12: L14.2 1134.69,999.09 C30.1
RF1_PA1_V33A: C25.1 L10.2 U2.72 | length 112.5
  Top Layer w8: v1(1192.91,877.95) 1195.23,880.27 U2.72
  Bottom Layer w6: L10.2 1153.86,803.46 1172.54,822.15 1172.54,833.96 1192.91,854.33 C25.1
RF_BIST: R7.1 U2.6 | length 89.2
  Top Layer w8: R7.1 1012.71,807.99 U2.6
RF_OUT0N: C16.1 C18.1 U2.60 | length 83.8
  Top Layer w8: C18.1 1384.2,961.11 U2.60
  Top Layer w12: C16.1 1380.32,1000 C18.1
RF_OUT0P: C17.1 C18.2 U2.59 | length 90.4
  Top Layer w8: U2.59 1399.95,944.95 C18.2
  Top Layer w12: C18.2 C17.1
RST_N: C34.1 R5.2 U2.17 | length 144.9
  Top Layer w8: C34.1@972.44,594.49 1011.81,633.86 1012.13,633.86 1013.03,634.76 U2.17
U3_1: C7.1 R1.1 U1.1 | length 214.5
  Top Layer w8: R1.1 1661.42,771.65 1718.4,771.65 1753.9,736.15 U1.1 1753.9,678.94 C7.1
UDM: J1.2 R16.2 U2.25 | length 679.1
  Top Layer w8: J1.2 1019.37,63.43 R16.2 ; U2.25 1210.88,371.27 v1(1216,366.14)
  Bottom Layer w8: J1.2 994.5,81.68 994.5,144.64 1196,346.14 1198.29,346.14 1216,363.86 v1(1216,366.14)
UDP: J1.3 R15.2 U2.24 | length 686.9
  Top Layer w8: J1.3 953.07,75.87 R15.2 ; v1(1190,366.14) 1195.13,371.27 U2.24
  Bottom Layer w8: J1.3 968.5,91.3 968.5,144.64 v1(1190,366.14)
UV+: C53.2 J1.1 R17.1 U3.3 U3.7 U3.9 | length 1216
  Top Layer w10: J1.1 1329.65,60.12 R17.1 ; U3.9 1545.67,190.55 v1(1543.31,192.91) 1574.8,192.91 1585.04,182.68 U3.7 ; C53.2 1565.36,-17.95 U3.3
  Bottom Layer w10: v1@1539.37,-27.56 1523.62,-11.81 1496.06,15.75 1496.06,149.61 1539.37,192.91 v1(1543.31,192.91)
  Bottom Layer w15: J1.1 1309.96,60.12 1381.89,-11.81 1523.62,-11.81 ; v1@1539.37,-27.56 1559.06,-47.24 v1(1562.99,-47.24)
  other v1: 1539.37,-19.68
VRES: C22.1 R3.1 U2.27 | length 114.4
  Top Layer w8: U2.27 1242.37,513.53 C22.1 R3.1
XTAL_40: R4.2 R6.1 U2.3 | length 133.6
  Top Layer w8: R4.2 1012.13,842.83 R6.1 1031.5,842.52 1044.21,855.23 U2.3
pads on no net: U2.5 U2.10 U2.11 U2.12 U2.13 U2.14 U2.15 U2.31 U2.32 U2.33 U2.34 U2.35 U2.40

## Polygon pours and split planes (outlines as drawn)
GND on Bottom Layer "Top Layer-No Net" (solid, remove dead copper, pour order 7): 613.9,1695 1968.5,1695 1968.5,-98.43 613.9,-98.43 613.9,-100
GND on Top Layer "Top Layer-No Net" (solid, remove dead copper, pour order 10): 613.9,1695 1968.5,1695 1968.5,-100 613.9,-100
GND on Signal Layer 1 "Top Layer-No Net" (solid, remove dead copper, pour order 12): 613.9,1681.1 1968.5,1681.1 1968.5,1695 1968.5,-100 613.9,-100
GND on GND (split plane): 1948.41,-79.9 633.99,-79.9 633.99,1674.9 1948.41,1674.9

## Keep-outs
Keep-Out Layer:
  the board outline again, w10

## Other copper
Top Layer:
  pour cut-out: 1501.97,1669.29 1608.27,1669.29 1608.27,1311.02 1501.97,1311.02
  pour cut-out: 1061.02,1669.29 1167.32,1669.29 1167.32,1311.02 1061.02,1311.02
  pour cut-out: 1259.85,1527.56 1366.15,1527.56 1366.15,1311.02 1259.85,1311.02
  pour cut-out: 850.39,1527.56 956.69,1527.56 956.69,1311.02 850.39,1311.02
  pour cut-out: 720.47,1311.02 1862.2,1311.02 1862.2,346.46 720.47,346.46
  pour cut-out: 1031.5,952.76 1476.38,952.76 1476.38,1259.84 1031.5,1259.84

## Silkscreen, mask and mechanical layers (free items; w line width, h text height)
Top Solder:
  rectangle: 1542.2,280 1925.2,345
  rectangle: 1590,1310 1925,1375
  rectangle: 1360,1310 1515,1375
  rectangle: 1145,1310 1265,1375
  rectangle: 930,1310 1070,1375
  rectangle: 670,1310 870,1375
  rectangle: 658.9,280 718.9,1375
  rectangle: 1863.9,315 1925,1375
  rectangle: 680,280 1480.32,345